# Altium PCB PracticePCB.PcbDoc
Units mil, origin at the board's own origin, x right, y up, seen from the top; angles counter-clockwise.
Board outline 710 x 895 mil, 2 copper layers (Top Layer, Bottom Layer); 18 components, 12 nets, 45 pads, 53 vias.
Unrouted connection lines stored in the file: 6.
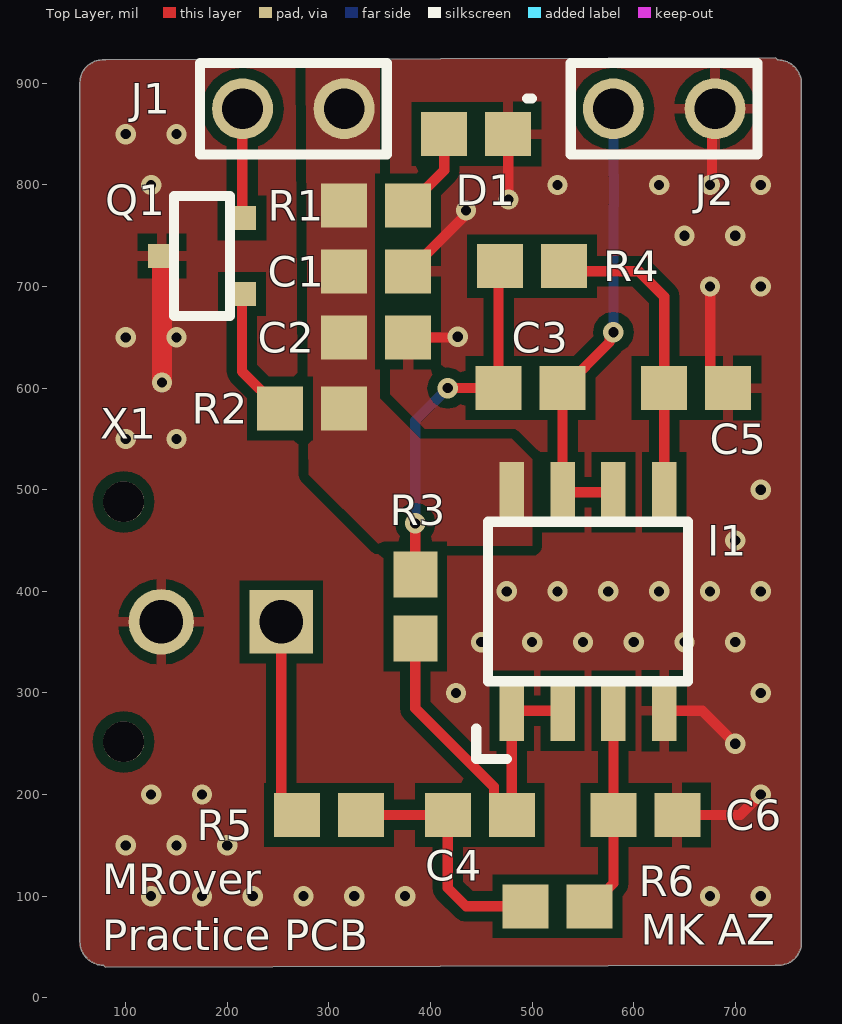
[diagram p0: Top Layer view]
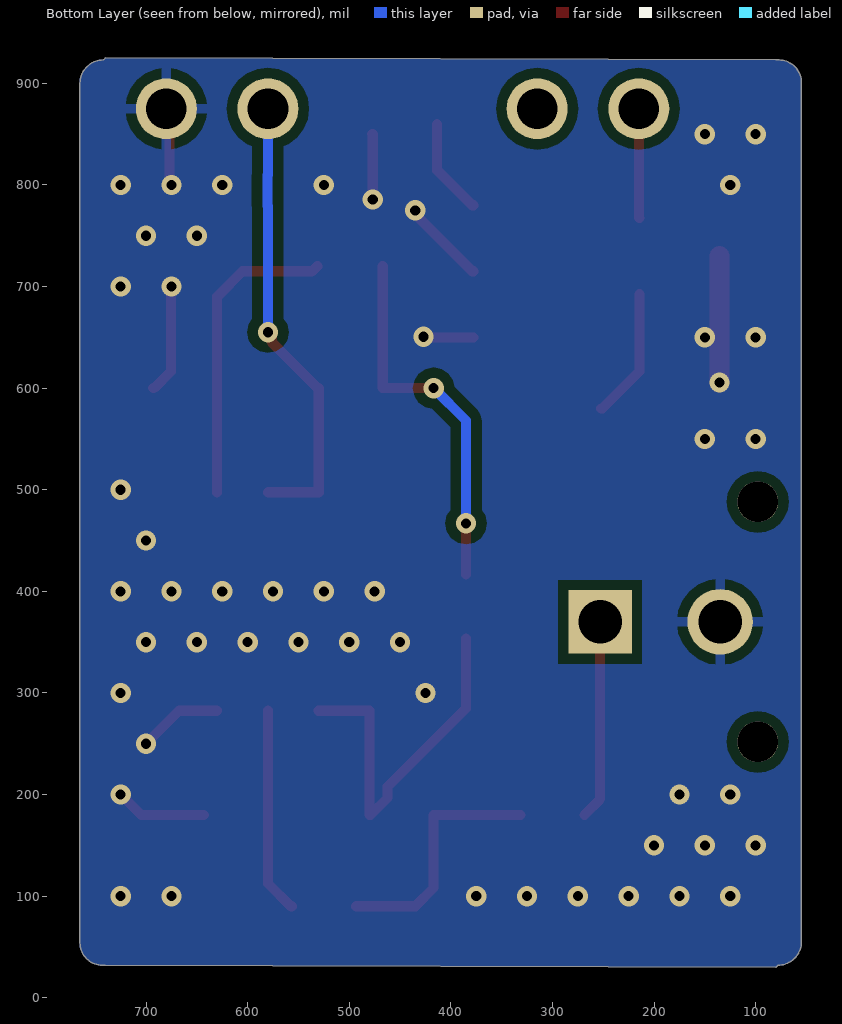
[diagram p1: Bottom Layer view, seen from below]
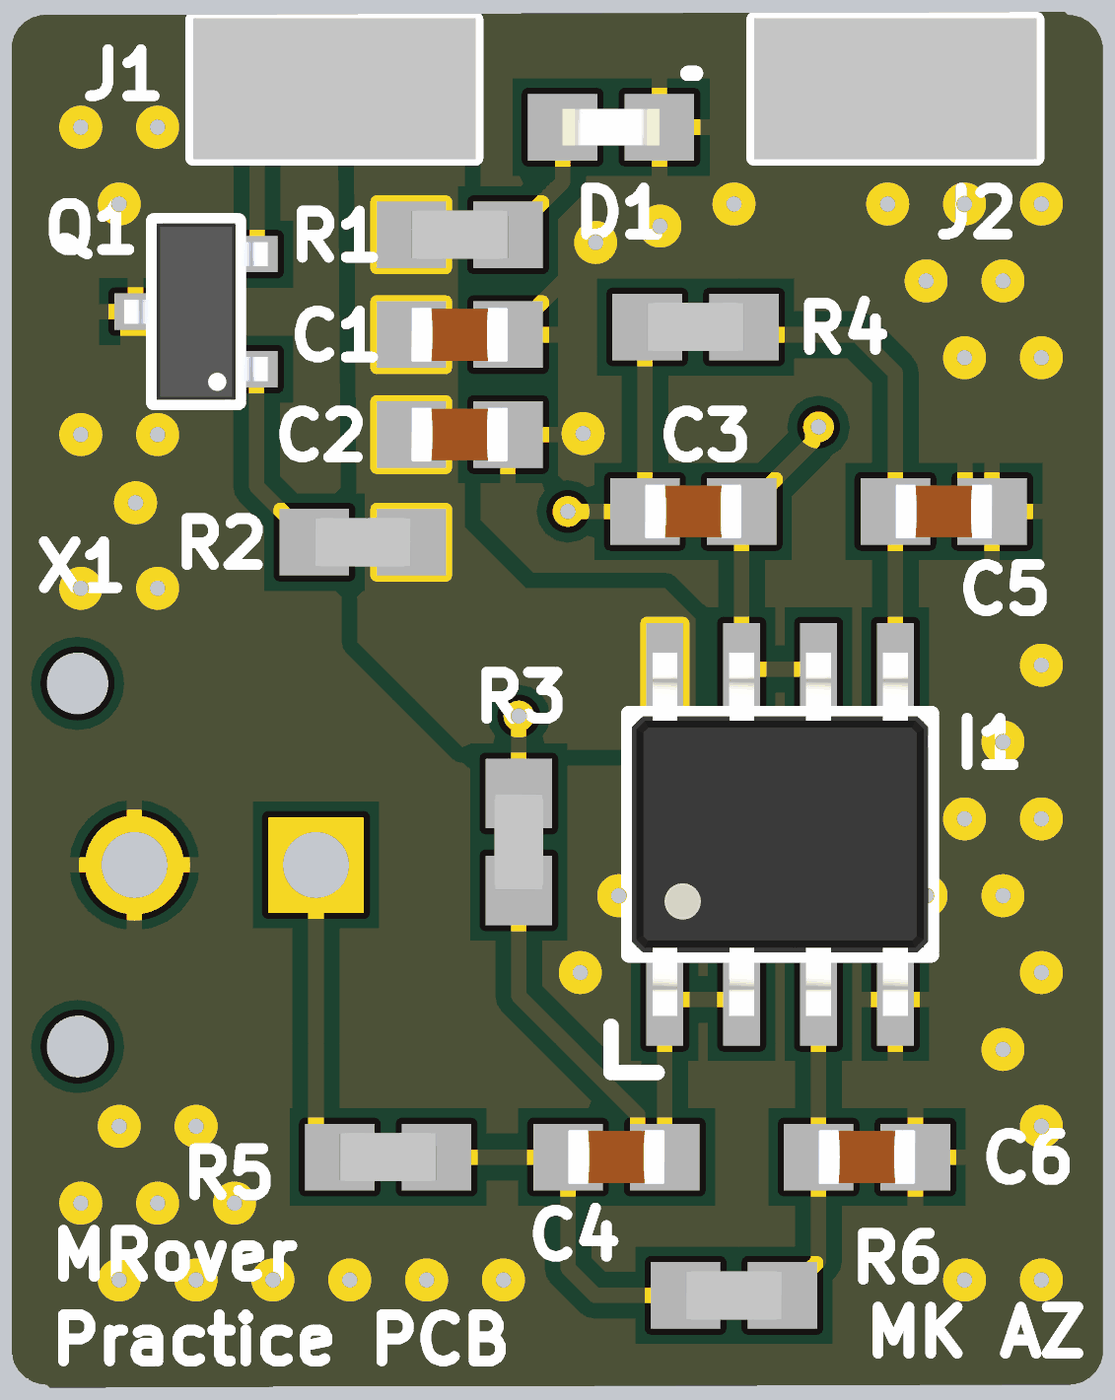
[diagram p2: 3D render of the assembled board from above, using the file's embedded part models]

## Layer stack, top to bottom
Top Solder: solder mask 0.4, Solder Resist, Dk 3.5
Top Layer: signal copper 1.4
Dielectric 1: dielectric 12.6, FR-4, Dk 4.8
Bottom Layer: signal copper 1.4
Bottom Solder: solder mask 0.4, Solder Resist, Dk 3.5

## Board outline
55,55 ccw(c78,55) 78,32 80,30 740,32 743,32 ccw(c742.84,54.16) 765,54.33 765,900 ccw(c742,900) 742,923 740,925 80,923 77,923 ccw(c77.16,900.84) 55,900.67

## Design rules (kind name [scope] priority, off if disabled: settings)
Clearance [All] p1: gap=10 ignorepadtopadclearanceinfootprint=FALSE except(0: Arc-Hole Track-Hole SMDPad-Hole THPad-Hole Via-Hole Fill-Hole Poly-Hole Region-Hole Text-Hole)
ComponentClearance [All] p1: gap=0 collisioncheckmode=3 verticalgap=0 showdistances=FALSE
DiffPairsRouting [All] p1: maxlimit=10 minlimit=10 mostfreqgap=10 substack1={45BC3B8F-42A4-4BBC-A049-2DD93A3522C6} toplayer_{45bc3b8f-42a4-4bbc-a049-2dd93a3522c6}_minwidth=15 toplayer_{45bc3b8f-42a4-4bbc-a049-2dd93a3522c6}_maxwidth=15 toplayer_{45bc3b8f-42a4-4bbc-a049-2dd93a3522c6}_prefwidth=15 bottomlayer_{45bc3b8f-42a4-4bbc-a049-2dd93a3522c6}_minwidth=15 bottomlayer_{45bc3b8f-42a4-4bbc-a049-2dd93a3522c6}_maxwidth=15 bottomlayer_{45bc3b8f-42a4-4bbc-a049-2dd93a3522c6}_prefwidth=15 toplayer_minwidth=15 toplayer_maxwidth=15 toplayer_prefwidth=15 bottomlayer_minwidth=15 bottomlayer_maxwidth=15 bottomlayer_prefwidth=15 substack2={0CD4D6B4-8B7D-4AE2-91F8-0522C7B0BC5E} toplayer_{0cd4d6b4-8b7d-4ae2-91f8-0522c7b0bc5e}_minwidth=15 toplayer_{0cd4d6b4-8b7d-4ae2-91f8-0522c7b0bc5e}_maxwidth=15 toplayer_{0cd4d6b4-8b7d-4ae2-91f8-0522c7b0bc5e}_prefwidth=15 bottomlayer_{0cd4d6b4-8b7d-4ae2-91f8-0522c7b0bc5e}_minwidth=15 bottomlayer_{0cd4d6b4-8b7d-4ae2-91f8-0522c7b0bc5e}_maxwidth=15 bottomlayer_{0cd4d6b4-8b7d-4ae2-91f8-0522c7b0bc5e}_prefwidth=15 substack3={F64B348C-2AD1-4796-BBCE-D1198425ABB3} toplayer_{f64b348c-2ad1-4796-bbce-d1198425abb3}_minwidth=15 toplayer_{f64b348c-2ad1-4796-bbce-d1198425abb3}_maxwidth=15 toplayer_{f64b348c-2ad1-4796-bbce-d1198425abb3}_prefwidth=15 bottomlayer_{f64b348c-2ad1-4796-bbce-d1198425abb3}_minwidth=15 bottomlayer_{f64b348c-2ad1-4796-bbce-d1198425abb3}_maxwidth=15 bottomlayer_{f64b348c-2ad1-4796-bbce-d1198425abb3}_prefwidth=15 substack4={B32B9A93-4F78-4AC9-9C56-EE3D6A96FC68} toplayer_{b32b9a93-4f78-4ac9-9c56-ee3d6a96fc68}_minwidth=15 toplayer_{b32b9a93-4f78-4ac9-9c56-ee3d6a96fc68}_maxwidth=15 toplayer_{b32b9a93-4f78-4ac9-9c56-ee3d6a96fc68}_prefwidth=15 bottomlayer_{b32b9a93-4f78-4ac9-9c56-ee3d6a96fc68}_minwidth=15 bottomlayer_{b32b9a93-4f78-4ac9-9c56-ee3d6a96fc68}_maxwidth=15 bottomlayer_{b32b9a93-4f78-4ac9-9c56-ee3d6a96fc68}_prefwidth=15 maxuncoupledlength=500
PlaneConnect [All] p1 off: planeconnectstyle=Relief reliefexpansion=20 reliefentries=4 reliefconductorwidth=10 reliefairgap=10
PolygonConnect PolygonConnect_2 [InNet('5V')] p1: connectstyle=Direct reliefconductorwidth=10 reliefentries=4 polygonreliefangle="90 Angle" airgapwidth=10
PolygonConnect PolygonConnect_1 [InNet('GND')] p2: thpad.connectstyle=Relief thpad.reliefconductorwidth=10 thpad.reliefentries=4 thpad.polygonreliefangle="90 Angle" thpad.airgapwidth=10 smdpad.connectstyle=Relief smdpad.reliefconductorwidth=10 smdpad.reliefentries=4 smdpad.polygonreliefangle="90 Angle" smdpad.airgapwidth=10 via.connectstyle=Direct via.reliefconductorwidth=10 via.reliefentries=4 via.polygonreliefangle="90 Angle" via.airgapwidth=10
PolygonConnect [All] p3: connectstyle=Relief reliefconductorwidth=10 reliefentries=4 polygonreliefangle="90 Angle" airgapwidth=10
RoutingVias [isVia] p1: holewidth=28 width=50 viastyle="Through Hole" minholewidth=28 minwidth=50 maxholewidth=28 maxwidth=50
SolderMaskExpansion SolderMaskExpansion_1 [All] p1: expansion=4 istentingtop=FALSE
SolderMaskExpansion SolderMaskExpansion_Via [IsVia] p2: expansion=4 istentingtop=TRUE
Width [All] p1: maxlimit=100 minlimit=10 preferedwidth=10 substack1={45BC3B8F-42A4-4BBC-A049-2DD93A3522C6} bottomlayer_maxwidth=10 substack2={0CD4D6B4-8B7D-4AE2-91F8-0522C7B0BC5E} substack3={F64B348C-2AD1-4796-BBCE-D1198425ABB3} substack4={B32B9A93-4F78-4AC9-9C56-EE3D6A96FC68} minimp=50.000000 maximp=50.000000 favimp=50.000000
27 further rules are at their usual default settings.

## Components (designator, comment, footprint, x,y, rotation, side; value= is the part's Value field where it differs from the comment)
C1 "CC0603KRX7R0BB104" CAP-0603 346.5,715 r0 top
C2 "C1608C0G2A103J080AC" CAP-0603 346.5,650 r0 top
C3 "CC0603KRX7R0BB104" CAP-0603 498.5,600 r0 top
C4 "CC0603KRX7R0BB104" CAP-0603 448.5,180 r0 top
C5 "C1608C0G2A103J080AC" CAP-0603 661.5,600 r0 top
C6 "C1608C0G2A103J080AC" CAP-0603 611.5,180 r0 top
D1 "150060AS75000" LED-0603 445,850 r0 top
I1 "LM358EDR2G" IC-OPAMP-0001 555,390 r0 top
J1 "Pin Header 2POS" CON-2POS-0001 265,875 r180 top
J2 "Pin Header 2POS" CON-2POS-0001 630,875 r0 top
Q1 "T2N7002AK,LM" NMOS-SOT23-3 175,730 r90 top
R1 "RT0603FRE131KL" RES-0603 346.5,780 r0 top
R2 "RC0603FR-0733RP" RES-0603 283.5,580 r180 top
R3 "RT0603FRE131KL" RES-0603 385,385 r90 top
R4 "RC0603FR-0710KP" RES-0603 500,720 r0 top
R5 "RT0603FRE131KL" RES-0603 300,180 r0 top
R6 "AF0603FR-074K7L" RES-0603 525,90 r0 top
X1 "Molex - Micro-Fit 3.0 Series connector,  3.00mm (0.118\") pitch header, 2 positions." 44914-0201 253.03,370 r90 top

## Footprints (in the part's own frame and the unit in brackets; to place one, negate y for a bottom-side part, rotate by r counter-clockwise, add the part's x,y. Pads: shape width x height; smd on the part's side, far side on the other; paste and mask are expansions set on the pad)
44914-0201 [mm]
  round 1.02 hole 1.02 unplated: 1(-3,3.94) 1(3,3.94)
  rect 1.583x1.583 / inner rect 1.524x1.524 / far side rect 1.583x1.583 hole 1.09: P$1(0,0)
  round 1.635 / inner round 1.524 / far side round 1.635 hole 1.09: P$2(0,3)
CAP-0603 [mm]
  rect 1.15x1.1 smd: 1(-0.8,0) 2(0.8,0)
  body extent -0.8,-0.45 0.8,0.45, height 0.8
CON-2POS-0001 [mil]
  round 60 hole 40: 1(-50,0) 2(50,0)
  silkscreen extent -92,-45 92,45, body extent -92,-46 92,46, height 418
IC-OPAMP-0001 [mil]
  rect 24x60 smd: 1(-75,-107.5) 2(-25,-107.5) 3(25,-107.5) 4(75,-107.5) 5(75,107.5) 6(25,107.5) 7(-25,107.5) 8(-75,107.5)
  silkscreen extent -110,-155 98,78, body extent -96,-118 96,118, height 69
LED-0603 [mm]
  rect 1.15x1.1 smd: 1(-0.8,0) 2(0.8,0)
  silkscreen extent 1.27,0.89 1.4,0.89, body extent -0.8,-0.3 0.8,0.3, height 1
NMOS-SOT23-3 [mm]
  rect 0.6x0.7 smd: 1(-0.95,-1) 2(0.95,-1) 3(0,1)
  silkscreen extent -1.5,-0.7 1.5,0.7, body extent -1.46,-1.18 1.46,1.19, height 1.12
RES-0603 [mm]
  rect 1.15x1.1 smd: 1(-0.8,0) 2(0.8,0)
  body extent -0.8,-0.4 0.8,0.4, height 0.43

## Part data
C1 C3 C4: library part CAP-100N-0001, "CAP CER 0.1UF 100V X7R 0603", Capacitance="100nF +/-10%", Manufacturer=YAGEO, Package Size=0603, Temperature Coefficient=X7R, Voltage Rating=100V, Assembled?=no, Manufacturer Part Number=CC0603KRX7R0BB104
C2 C5 C6: library part CAP-10N-0002, "CAP CER 10000PF 100V C0G 0603", Capacitance="10nF +/-5%", Manufacturer="TDK Corporation", Package Size=0603, Temperature Coefficient=C0G/NP0, Voltage Rating=100V, Assembled?=no, Manufacturer Part Number=C1608C0G2A103J080AC
D1: library part LED_Amber_0001, "CAP CER 0.1UF 100V X7R 0603", Color=Amber, Current Rating=20mA, Manufacturer="Wurth Electronik", Package Size=0603, Assembled?=no, Manufacturer Part Number=150060AS75000, Vf=2V
I1: library part IC-OPAMP-0001, "IC OPAMP GP 2 CIRCUIT 8SOIC", Manufacturer=onsemi, Package=8-SOIC, Supply Current - Max=3mA, Assembled?=no, CMRR=70dB, Manufacturer Part Number=LM358EDR2G, Rail-to-Rail?=no, VCC-Max=32V, VCC-Min=3V
J1 J2: library part CON-2POS-0001, Assembled?=no, Pins=2, Rows=1
Q1: library part NMOS-200MA-0001, "MOSFET N-CH 60V 200MA SOT23", Manufacturer=Toshiba, Package=SOT-23-3, Assembled?=no, FET type=N-Channel, Id-Continuous=200mA, Manufacturer Part Number=T2N7002AK,LM, Rds On-Max=3.9Ohm, VDS-Max=60V, Vgs-Max=20V
R1 R3 R5: library part RES-1K-0002, "CHIP RESISTOR THIN FLIM HIGH PRE", Manufacturer=YAGEO, Package Size=0603, Power Rating=1/10W, Resistance="1kOhm +/-1%", Assembled?=no, Manufacturer Part Number=RT0603FRE131KL
R2: library part RES-33-0002, "RES SMD 33 OHM 1% 1/10W 0603", Manufacturer=YAGEO, Package Size=0603, Power Rating=1/10W, Resistance="33Ohm +/-1%", Assembled?=no, Manufacturer Part Number=RC0603FR-0733RP
R4: library part RES-10K-0002, "RES SMD 10K OHM 1% 1/10W 0603", Manufacturer=YAGEO, Package Size=0603, Power Rating=1/10W, Resistance="10kOhm +/-1%", Assembled?=no, Manufacturer Part Number=RC0603FR-0710KP
R6: library part RES-4.7K-0002, "RES SMD 4.7K OHM 1% 1/10W 0603", Manufacturer=YAGEO, Package Size=0603, Power Rating=1/10W, Resistance="4.7kOhm +/-1%", Assembled?=no, Manufacturer Part Number=AF0603FR-074K7L
X1: library part HEADER_POS2_?44914-0201, Package=44914-0201, DeviceName=44914-0201, DeviceSetName=HEADER_POS2_?, GateName_1=G$1, LibraryName=con-molex-micro-fit-3_0_2, SymbolName_1=HEADER_POS2

## Via types
v1: diameter 20, hole 10, Top Layer to Bottom Layer, 53 vias

## Nets (pads, with @x,y where several pads share a name; then routed paths per layer and width w, separated by ;. In a path a pad name is that pad's centre, name@x,y a point inside that pad or via, vN(x,y) a via of type N, cw(c..) or ccw(c..) an arc to the next point about the centre after c; other vN are vias at no path point)
5V: C1.1 C2.1 I1.8 J1.1 R1.1 R2.1
GND: C1.2 C2.2 C5.2 C6.2 D1.2 I1.4 J2.2 Q1.3 X1.P$2 | length 739.8
  Top Layer w10: C2.2 v1@425,650 ; C1.2 378.98,715 433.09,769.11 433.09,773.09 v1(435,775) ; v1@475,785 v1@476.5,786.5 ; D1.2@477.48,850 D1.2 ; I1.4 667.5,282.5 v1(700,250) ; C6.2 705,180 v1(725,200) ; v1(675,700) 675.35,699.65 675.35,616.65 692.01,600 C5.2 ; v1(675,800) 676.91,801.91 676.91,866.91 J2.2@680,870 ; v1@476.5,786.5 476.82,786.82 476.82,849.67 D1.2 ; v1@476.5,786.5 D1.2
  Top Layer w20: v1(135.63,605.63) Q1.3
  other v1: 125,100 175,100 225,100 275,100 325,100 375,100 675,100 725,100 100,150 150,150 200,150 125,200 175,200 425,300 725,300 450,350 500,350 550,350 600,350 650,350 700,350 475,400 525,400 575,400 625,400 675,400 725,400 700,450 725,500 100,550 150,550 100,650 150,650 426.82,650.67 725,700 650,750 700,750 476.82,785.67 125,800 525,800 625,800 725,800 100,850 150,850
NetC3_1: C3.1 R3.2 R4.1 | length 366.8
  Top Layer w10: R3.2 v1@385,465 ; v1@415,600 v1(416.91,600) C3.1 R4.1@467.01,720
  Bottom Layer w10: v1(385,466.91) 385,568.09 v1(416.91,600)
NetC3_2: C3.2 I1.6 I1.7 J2.1 | length 444.1
  Top Layer w10: I1.6 I1.7 C3.2 530.98,600 576.17,645.19 576.17,651.17 v1(580,655)
  Bottom Layer w10: v1(580,655) 580,779.14 580.43,779.58 580.43,809.57 580,810 J2.1@580,870
NetC4_1: C4.1 R5.2 R6.1 | length 241.5
  Top Layer w10: R5.2 C4.1 417.01,107.99 435,90 R6.1
NetC4_2: C4.2 I1.1 I1.2 R3.1 | length 365.9
  Top Layer w10: R3.1 385,285 462.36,207.64 462.36,196.65 479.02,180 C4.2 I1.1 I1.2
NetC5_1: C5.1 I1.5 R4.2 | length 303.4
  Top Layer w10: R4.2 536.5,715 605,715 630,690 C5.1 I1.5
NetC6_1: C6.1 I1.3 R6.2 | length 202.8
  Top Layer w10: R6.2 557.48,90 580,112.52 C6.1 I1.3
NetD1_1: D1.1 R1.2 | length 95.3
  Top Layer w10: R1.2 378.98,780 413.5,814.53 D1.1@413.5,860
NetJ1_2: J1.2 Q1.2 | length 107.9
  Top Layer w10: Q1.2 214.69,767.72 214.69,874.69 J1.2
NetQ1_1: Q1.1 R2.2 | length 128.8
  Top Layer w10: Q1.1 214.37,616.65 251.02,580 R2.2
NetR5_1: R5.1 X1.P$1 | length 196.4
  Top Layer w10: X1.P$1 253.03,195.47 R5.1
pads on no net: X1.1

## Polygon pours and split planes (outlines as drawn)
GND on Top Layer "GND_L01_P006" (solid, remove dead copper, pour order 6): 55,55 ccw(c78,55) 78,32 80,30 740,32 743,32 ccw(c742.84,54.16) 765,54.33 765,900 ccw(c742,900) 742,923 740,925 80,923 77,923 ccw(c77.16,900.84) 55,900.67
5V on Top Layer "5V_L01_P003" (solid, remove dead copper, pour order 3): 285,915 277.01,922.99 280,515 350,445 500,445 500,530 480,550 390,550 350,590 350,915
GND on Bottom Layer "GND_L02_P004" (solid, remove dead copper, pour order 4): 55,55 ccw(c78,55) 78,32 80,30 740,32 743,32 ccw(c742.84,54.16) 765,54.33 765,900 ccw(c742,900) 742,923 740,925 80,923 77,923 ccw(c77.16,900.84) 55,900.67

## Silkscreen, mask and mechanical layers (free items; w line width, h text height)
Top Overlay:
  text "MRover" at 77,102 h30
  text "MK AZ" at 607,52 h30
  text "Practice PCB" at 77,47 h30
Mechanical 1:
  lines w10: 77,923 ccw(c77.16,900.84) 55,900.67 55,55 ccw(c78,55) 78,32 ; 80,30 740,32 ; 80,923 740,925 ; 742,923 cw(c742,900) 765,900 765,54.33 cw(c742.84,54.16) 743,32